# EAGLE board aircom (EAGLE 6.2)
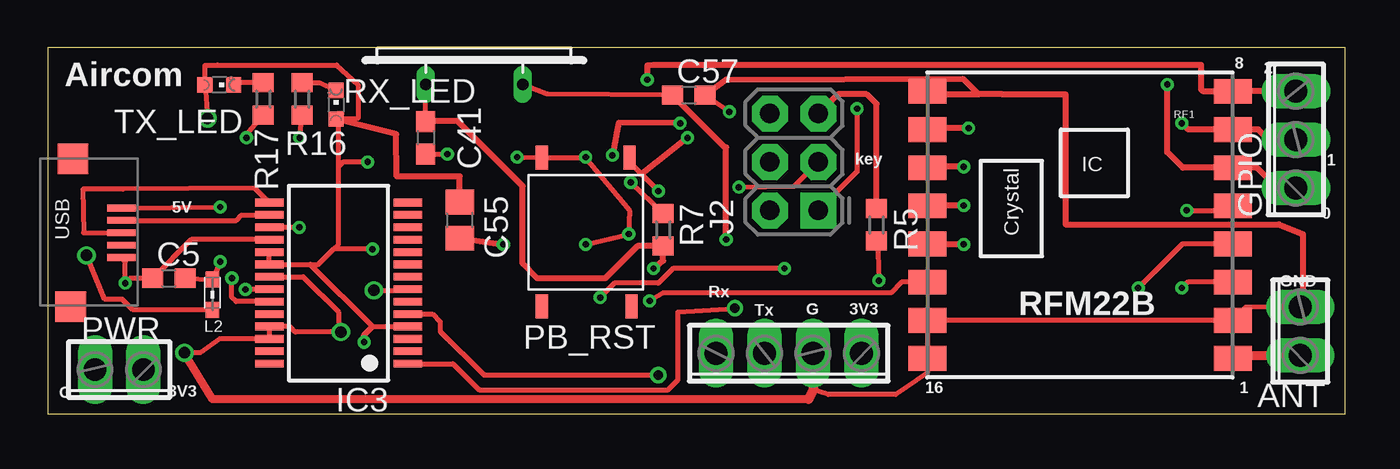
[diagram p0: board, top side]
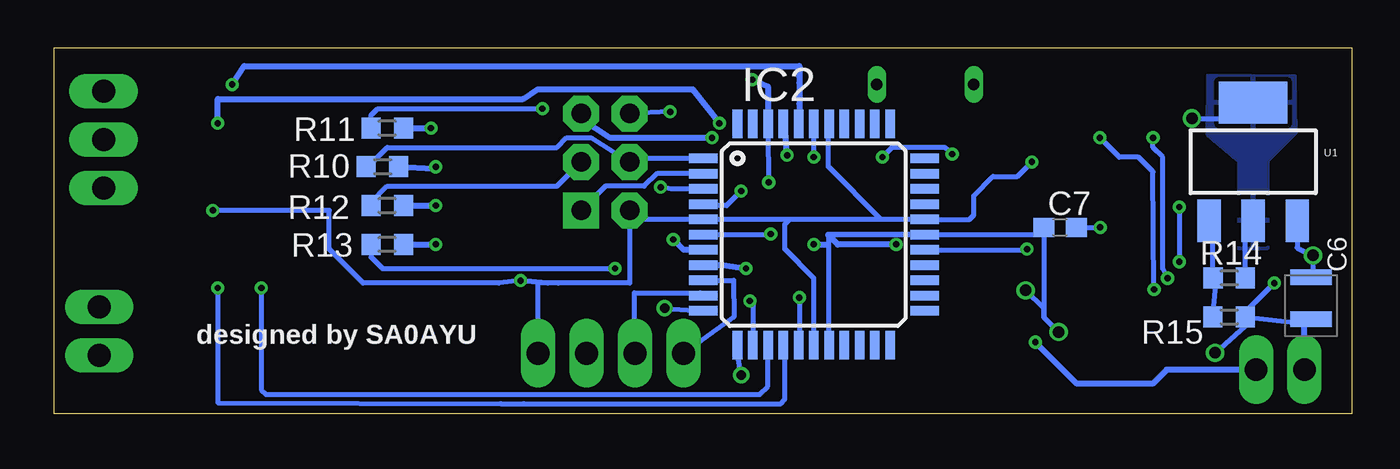
[diagram p1: board, bottom side, seen from below]

Size 68 x 19.2 mm. Coordinates in mm from the lower left corner, seen from the top.
Outline: 0,0 68,0 68,19.2 0,19.2 0,0
Copper layers (1*16): Top 0.0356mm / dielectric 1.5011mm / Bottom 0.0356mm
Design rules: minimum track width 6mil, minimum drill 13mil, track to track 6mil, track to pad 6mil, pad to pad 6mil, via to via 6mil, smd to smd 6mil, copper to edge 15mil, drill to drill 6mil, minimum pad ring 7mil, minimum via ring 7mil, stop-mask expansion 4mil, vias tented up to drill 0mil, thermal gap 10mil

## Footprints (pad centres in the part's own frame; a part is rotated, then mirrored left to right if it is on the bottom)
2POL254 = drill 1.2 long: 1 -1.27,0; 2 1.27,0
C0603 = smd 1.1 x 1: 1 -0.85,0; 2 0.85,0
SMC_CAP_B = smd 0.8 x 2.2: + -1.37,0.3; - 0.83,0.3
C0805 = smd 1.3 x 1.5: 1 -0.95,0; 2 0.95,0
3POL254 = drill 1.2 long: 1 -2.54,0; 2 0,0; 3 2.54,0
TQFP44 = smd 1.5 x 0.5: 1 -5.8,4; 2 -5.8,3.2; 3 -5.8,2.4; 4 -5.8,1.6; 5 -5.8,0.8; 6 -5.8,0; 7 -5.8,-0.8; 8 -5.8,-1.6; 9 -5.8,-2.4; 10 -5.8,-3.2; 11 -5.8,-4; 23 5.8,-4; 24 5.8,-3.2; 25 5.8,-2.4; 26 5.8,-1.6; 27 5.8,-0.8; 28 5.8,0; 29 5.8,0.8; 30 5.8,1.6; 31 5.8,2.4; 32 5.8,3.2; 33 5.8,4 | smd 0.5 x 1.5: 12 -4,-5.8; 13 -3.2,-5.8; 14 -2.4,-5.8; 15 -1.6,-5.8; 16 -0.8,-5.8; 17 0,-5.8; 18 0.8,-5.8; 19 1.6,-5.8; 20 2.4,-5.8; 21 3.2,-5.8; 22 4,-5.8; 34 4,5.8; 35 3.2,5.8; 36 2.4,5.8; 37 1.6,5.8; 38 0.8,5.8; 39 0,5.8; 40 -0.8,5.8; 41 -1.6,5.8; 42 -2.4,5.8; 43 -3.2,5.8; 44 -4,5.8
SSOP28 = smd 0.4 x 1.5: 1 -4.225,-3.625; 2 -3.575,-3.625; 3 -2.925,-3.625; 4 -2.275,-3.625; 5 -1.625,-3.625; 6 -0.975,-3.625; 7 -0.325,-3.625; 8 0.325,-3.625; 9 0.975,-3.625; 10 1.625,-3.625; 11 2.275,-3.625; 12 2.925,-3.625; 13 3.575,-3.625; 14 4.225,-3.625; 15 4.225,3.625; 16 3.575,3.625; 17 2.925,3.625; 18 2.275,3.625; 19 1.625,3.625; 20 0.975,3.625; 21 0.325,3.625; 22 -0.325,3.625; 23 -0.975,3.625; 24 -1.625,3.625; 25 -2.275,3.625; 26 -2.925,3.625; 27 -3.575,3.625; 28 -4.225,3.625
2X3-NS = drill 1.016 pad 1.88 square: 1 -2.54,-1.27 | drill 1.016 pad 1.88 octagon: 2 -2.54,1.27; 3 0,-1.27; 4 0,1.27; 5 2.54,-1.27; 6 2.54,1.27
0603 = smd 0.85 x 0.7: 1 -0.9,0; 2 0.7,0
PUSHBUTTON = smd 0.635 x 1.27: IN -2.3,4.29; IN2 -2.3,-3.51; OUT 2.3,4.29; OUT2 2.4,-3.51
Q = drill 0.61 long: 1 -2.54,-1.27; 2 2.54,-1.27
R0603 = smd 1 x 1.1: 1 -0.85,0; 2 0.85,0
RFM22-XXX-S2 = smd 2 x 1.3: 1 -8,7; 2 -8,5; 3 -8,3; 4 -8,1; 5 -8,-1; 6 -8,-3; 7 -8,-5; 8 -8,-7; 9 8,-7; 10 8,-5; 11 8,-3; 12 8,-1; 13 8,1; 14 8,3; 15 8,5; 16 8,7
4POL254 = drill 1.2 long: 1 -3.81,0; 2 -1.27,0; 3 1.27,0; 4 3.81,0
CHIPLED_0603 = smd 0.8 x 0.8: A 0,-0.75; C 0,0.75
SOT223 = smd 1.219 x 2.235: 1 -2.311,-3.099; 2 0,-3.099; 3 2.311,-3.099 | smd 3.6 x 2.2: 4 0,3.099
USB_MICRO_B = smd 0.35 x 1.5: 1 -0.38,-1.58; 2 -1.03,-1.58; 3 -1.68,-1.58; 4 -2.33,-1.58; 5 -2.98,-1.58 | smd 1.6 x 1.6: 6 -5.55,1.08; 7 2.2,0.97

## Placement (x,y rotation side)
ANT  [2POL254]  65.64,4.34 90 top
C5  10n  [C0603]  6.35,7.11 0 top
C6  4.7uF  [SMC_CAP_B]  2.44,5.8 270 bottom
C7  10n  [C0603]  15.29,9.78 0 bottom
C41  33p  [C0603]  19.81,14.48 270 top
C55  1µ  [C0805]  21.59,10.16 270 top
C57  33p  [C0603]  33.6,16.71 0 top
GPIO  [3POL254]  65.42,14.39 90 top
IC2  ATMEGA644-PUTQFP44  [TQFP44]  28.19,9.4 0 bottom
IC3  FT232RL  [SSOP28]  15.24,6.86 90 top
J2  AVR_SPI_PRG_6NS  [2X3-NS]  39.12,13.21 90 top
L2  300ohm  [0603]  8.64,6.35 90 top
PB_RST  PUSHBUTTON  [PUSHBUTTON]  28.19,9.14 0 top
PWR  [2POL254]  3.75,2.32 180 top
Q1  3.6864 MHz  [Q]  22.35,18.54 0 top
R5  2k4  [R0603]  43.43,9.91 270 top
R7  0  [R0603]  32.26,9.65 90 top
R10  0  [R0603]  50.8,12.95 180 bottom
R11  0  [R0603]  50.55,14.99 180 bottom
R12  0  [R0603]  50.55,10.92 180 bottom
R13  0  [R0603]  50.55,8.89 0 bottom
R14  390  [R0603]  6.42,7.13 0 bottom
R15  680  [R0603]  6.42,5.08 180 bottom
R16  270  [R0603]  13.34,16.51 90 top
R17  270  [R0603]  11.3,16.51 90 top
RF1  RFM22SMD  [RFM22-XXX-S2]  54.1,9.91 180 top
RS-232  [4POL254]  38.84,3.17 180 top
RX_LED  [CHIPLED_0603]  15.11,16.21 0 top
TX_LED  [CHIPLED_0603]  8.99,17.25 270 top
U1  V_REG_317SMD  [SOT223]  5.17,13.22 0 bottom
USB  USB_MICRO_B  [USB_MICRO_B]  2.29,11.18 90 top

## Library data of the parts
ANT GPIO PWR RS-232 = con-phoenix-254; OC_FARNELL: unknown; OC_NEWARK: unknown
C5 C7 C41 C55 C57 = rcl
C6 PB_RST USB = jockes_lib
IC2 = atmel
IC3 = ftdichip; MPN: FT232RL; OC_FARNELL: 1146032; OC_NEWARK: 91K9918
J2 RF1 U1 = SparkFun
L2 = wuerth-elektronik
Q1 = special
R5 R7 R10-R17 = resistor
RX_LED TX_LED = led

## Nets
3V3OUT: C7.2 IC3.17
+3V3: C55.1 IC2.5 IC2.17 IC2.27 IC2.29 IC2.38 IC3.4 IC3.19 IC3.20 J2.2 PWR.1 R5.2 R14.2 RF1.5 RS-232.1 RX_LED.A TX_LED.A U1.2 U1.4
+5V: C6.+ L2.1 U1.3
AGND: ANT.2 C5.1 C6.- C7.1 C41.2 C55.2 C57.2 IC2.6 IC2.18 IC2.28 IC2.39 IC3.7 IC3.18 IC3.21 IC3.25 IC3.26 J2.6 PB_RST.IN PWR.2 R15.1 RF1.2 RF1.9 RF1.15 RF1.16 RS-232.2 USB.5
AVR_RX: IC2.9 RS-232.4
AVR_RX1: IC2.11 IC3.1
AVR_TX: IC2.10 RS-232.3
AVR_TX1: IC2.12 IC3.5
CS_N: R13.2 RF1.13
D+: IC3.15 USB.3
D-: IC3.16 USB.2
GPIO0: GPIO.1 IC2.40 RF1.6
GPIO1: GPIO.2 IC2.41 RF1.7
GPIO2: GPIO.3 IC2.42 R7.2 RF1.8
IRQ_N: IC2.13 RF1.14
LED_RX: IC3.22 R16.1
LED_TX: IC3.23 R17.1
MISO: IC2.2 J2.1 R11.2
MOSI: IC2.1 J2.4 R10.2
N$1: ANT.1 RF1.1
N$6: R14.1 R15.2 U1.1
N$9: IC2.16 R13.1
N$16: R16.2 RX_LED.C
N$17: R17.2 TX_LED.C
RESET: IC2.4 J2.5 PB_RST.OUT R5.1
RXANT: IC2.15 RF1.3
SCK: IC2.3 J2.3 R12.2
SCLK: R12.1 RF1.12
SDI: R10.1 RF1.11
SDO: R11.1 RF1.10
TXANT: IC2.14 RF1.4
USB_VCC: C5.2 L2.2 USB.1
XTAL1: C41.1 IC2.8 Q1.1 R7.1
XTAL2: C57.1 IC2.7 Q1.2

## Tracks (layer width: path | path; a pad name or v marks a point on that pad's centre or on a via)
3V3OUT  (via drill 0.33)
  Top 0.254: v13.18,9.78 IC3.17
  Bottom 0.254: C7.2 v13.18,9.78
+3V3  (via drill 0.33, 0.6)
  Top 0.254: IC3.20 IC3.19 | IC3.20 13.76,7.83 17.02,4.57 18.85,4.57 IC3.4 | IC3.20 14.18,7.83 14.99,8.64 | 14.99,8.64 15.24,8.89 15.24,12.95 | 15.24,12.95 15.24,15.76 15.42,15.76 RX_LED.A 16.26,15.49 16.26,17.27 15.15,18.29 8.89,18.29 8.24,18.27 TX_LED.A 8.39,15.51 v8.38,15.49 | v16.76,13.21 15.49,13.21 15.24,12.95 | v17.02,8.64 14.99,8.64 | v59.69,10.67 61.86,10.67 RF1.5 | R5.2 43.52,8.47 v43.56,6.98
  Top 0.305: C55.1 21.59,12.45 18.29,12.45 18.27,14.67 RX_LED.A | v16.59,3.76 16.59,4.14 17.02,4.57
  Bottom 0.254: R14.2 5.57,9.73 U1.2 | v8.38,15.49 6,15.49 U1.4 | v16.76,13.21 17.53,12.45 18.8,12.45 19.81,11.43 19.81,10.41 20.03,10.2 IC2.29 24.68,10.2 | 24.68,10.2 27.43,12.95 27.43,15.16 IC2.38 | IC2.27 17.06,8.6 v17.02,8.64 | 24.68,10.2 29.46,10.2 | 29.46,10.2 29.72,10.2 IC2.5 37.38,10.2 J2.2 37.85,6.86 41.58,6.86 | IC2.17 28.19,7.11 29.72,8.64 29.72,9.94 29.46,10.2 | 41.58,6.86 42.67,6.86 RS-232.1 | 41.58,6.86 42.14,6.86 | 42.14,6.86 v43.56,6.98 | v43.56,6.98 44.7,6.86 51.82,6.86 53.59,8.64 53.59,10.67 v59.69,10.67 | v43.56,6.98 42.14,6.86
  Bottom 0.305: PWR.1 9.7,2.32 10.44,1.57 14.4,1.57 v16.59,3.76
  pour Bottom: 5.93,8.65 5.93,13.22 7.56,14.62 7.53,17.8 2.99,17.75 2.94,14.7 4.41,13.22 4.41,8.65
+5V  (via drill 0.6)
  Top 0.254: L2.1 4.46,5.45 3.91,6 3,6 v2.03,8.31
  Bottom 0.254: C6.+ 2.06,7.3 v2.03,8.31 2.86,8.7 U1.3
AGND  (via drill 0.33, 0.6)
  Top 0.254: USB.5 4.06,8 v4.06,6.86 4.32,7.11 C5.1 7.52,9.13 IC3.18 | v7.16,3.2 8,3.2 9.01,3.93 IC3.26 IC3.25 12.7,4.57 12.98,4.29 v15.37,4.29 15.24,4.42 15.24,5.33 13.39,7.18 IC3.21 | v17.09,6.48 18.81,6.48 IC3.7 | C57.2 v35.72,15.84 | C41.2 v20.94,13.63 | v24.6,13.46 PB_RST.IN 28.17,13.43 | ANT.2 62.78,5.59 RF1.2 RF1.15 RF1.16 46.1,2.16 44.45,1.02 40.89,1.02 40.13,1.27 RS-232.2 | 28.17,13.43 v28.19,13.46 | 28.17,13.43 30.48,10.67 v30.45,9.43 30.42,9.4 v28.19,8.89
  Top 0.305: C55.2 v23.88,8.89 | ANT.2 65.79,5.7 65.79,9.43 64.53,9.94 53.34,9.94 53.34,16.76 50.03,16.75 48.78,16.75 48.77,16.76 | C57.2 35.56,17.53 47.96,17.58 48.77,16.76 | RF1.9 46.24,16.76 48.77,16.76
  Top 0.406: 39.88,0.76 8.64,0.76 v7.16,3.2
  Top 0.508: RS-232.2 40.13,1.27 39.88,0.76
  Bottom 0.254: R15.1 2.78,4.77 C6.- | R15.1 5.42,5.5 v4.06,6.86 | v7.16,3.2 5.59,4.61 R15.1 | 16.14,5.07 C7.1 16.52,9.4 IC2.28 | 16.14,5.07 v15.37,4.29 | 16.14,5.07 16.14,5.52 v17.09,6.48 | v35.72,15.84 J2.6 | v20.94,13.63 21.34,13.97 23.37,13.97 24.09,13.97 v24.6,13.46 | 27.43,9.4 IC2.28 | IC2.28 27.43,9.4 | 27.43,9.4 27.43,8.89 27.43,3.64 IC2.18 | v28.19,13.46 IC2.39 | IC2.6 30.48,9.4 v30.45,9.43
  Bottom 0.305: v23.88,8.89 26.93,8.88 27.43,9.38 27.43,9.4 | v28.19,8.89 27.43,8.89 | PWR.2 2.48,4.63 C6.-
AVR_RX
  Bottom 0.254: IC2.9 32.4,7 32.39,5.08 RS-232.4
AVR_RX1  (via drill 0.5)
  Top 0.254: IC3.1 21.24,2.63 22.61,1.27 32.51,1.27 33.02,1.78 33.02,4.06 33.02,5.33 v36.02,5.54
  Bottom 0.254: v36.02,5.54 IC2.11
AVR_TX
  Bottom 0.254: RS-232.3 37.59,6.35 34.15,6.35 IC2.10
AVR_TX1  (via drill 0.5)
  Top 0.254: IC3.5 20.17,5.23 20.57,4.83 20.57,4.32 22.86,2.03 v32,2.03
  Bottom 0.254: v32,2.03 32.26,3.53 IC2.12
CS_N  (via drill 0.33)
  Top 0.305: v48.01,8.89 46.12,8.89 RF1.13
  Bottom 0.305: R13.2 v48.01,8.89
D+
  Top 0.254: IC3.15 10.85,11.84 3.94,11.79 1.84,11.79 1.88,9.5 USB.3
D-
  Top 0.254: USB.2 9.89,10.15 10.16,10.41 11.6,10.41 IC3.16
GPIO0  (via drill 0.33)
  Top 0.305: v58.67,17.27 58.67,13.72 59.48,12.91 RF1.6 63.37,12.9 64.43,11.85 GPIO.1
  Bottom 0.305: v58.67,17.27 58.04,18.24 28.96,18.24 28.96,17.68 28.96,17.35 28.96,16.92 28.96,16.26 28.96,15.24 IC2.40
GPIO1  (via drill 0.33)
  Top 0.305: v59.44,15.24 59.77,14.91 RF1.7 63.45,14.91 63.97,14.39 GPIO.2 | v33.15,15.24 29.92,15.26 v29.59,13.56
  Bottom 0.305: v59.44,15.24 59.44,16.51 43.43,16.51 42.67,17.02 34.54,17.02 v33.15,15.24 | v29.59,13.56 29.72,15.27 IC2.41
GPIO2  (via drill 0.33)
  Top 0.254: R7.2 30.57,12.1 v30.56,12.14
  Top 0.305: v31.42,17.53 31.42,18.26 31.73,18.29 60.2,18.29 60.45,18.29 60.45,17.02 60.56,16.91 RF1.8 62.13,16.93 GPIO.3
  Bottom 0.254: v30.56,12.14 30.56,13.21 30.58,13.74 30.58,15.19 IC2.42
  Bottom 0.305: v31.42,17.53 30.61,17.17 30.61,15.21 IC2.42
IRQ_N  (via drill 0.33)
  Top 0.254: RF1.14 44.75,6.91 44.2,6.35 32.26,6.35 v31.55,5.92
  Bottom 0.254: v31.55,5.92 31.39,5.77 31.39,4.67 31.39,3.83 IC2.13
LED_RX  (via drill 0.33)
  Top 0.254: IC3.22 10.49,6.53 v10.36,6.53 | v13.21,14.48 R16.1
  Bottom 0.254: v10.36,6.53 10.41,12.7 11.18,13.46 12.19,13.46 v13.21,14.48
LED_TX  (via drill 0.33)
  Top 0.254: IC3.23 9.87,5.88 9.65,6.1 v9.65,7.11 | v10.41,14.48 10.41,14.64 R17.1
  Bottom 0.254: v9.65,7.11 9.91,7.62 9.91,13.46 10.41,13.97 v10.41,14.48
MISO  (via drill 0.33)
  Top 0.254: v42.42,16 42.42,12.7 J2.1
  Bottom 0.254: IC2.2 36.42,12.6 37.08,11.94 39.12,11.94 J2.1 | R11.2 51.4,15.66 51.05,16 v42.42,16
MOSI
  Bottom 0.254: IC2.1 37.66,13.4 J2.4 39.88,14.48 41.15,14.48 41.66,13.97 50.55,13.97 51.56,12.95 R10.2
N$1
  Top 0.508: ANT.1 62.24,3.05 RF1.1
N$6
  Bottom 0.254: R15.2 7.12,6.73 R14.1 7.27,9.91 U1.1
N$9  (via drill 0.33)
  Top 0.254: v38.61,7.62 32.77,7.62 32,6.86 29.72,6.86 v28.96,6.1
  Bottom 0.254: R13.1 51.4,8.22 50.8,7.62 v38.61,7.62 | v28.96,6.1 28.96,3.64 IC2.16
N$16
  Top 0.254: R16.2 14.25,17.36 RX_LED.C
N$17
  Top 0.254: R17.2 9.98,17.36 TX_LED.C
RESET  (via drill 0.33)
  Top 0.254: PB_RST.OUT 30.49,13.19 31.12,12.57 v32,11.68
  Top 0.305: v33.53,14.48 31.12,12.57 | R5.1 43.43,16.26 42.93,16.76 41.4,16.76 J2.5
  Bottom 0.254: v32,11.68 32.77,10.92 33.92,10.92 IC2.4
  Bottom 0.305: J2.5 40.39,15.49 38.86,14.48 v33.53,14.48
RXANT  (via drill 0.33)
  Top 0.254: RF1.3 59.74,6.91 v59.44,6.6
  Bottom 0.254: v59.44,6.6 59.44,1.52 59.44,0.58 44.6,0.53 43.38,0.53 29.92,0.53 29.72,0.76 29.72,3.52 IC2.15
SCK  (via drill 0.33)
  Top 0.254: v36.22,11.89 39.12,11.94 J2.3
  Bottom 0.254: IC2.3 35.67,11.8 v36.22,11.89 | R12.2 51.4,11.09 50.55,11.94 41.66,11.94 J2.3
SCLK  (via drill 0.33)
  Top 0.305: v48.01,10.92 46.12,10.92 RF1.12
  Bottom 0.305: R12.1 v48.01,10.92
SDI  (via drill 0.33)
  Top 0.305: v48.01,12.95 46.15,12.95 RF1.11
  Bottom 0.305: R10.1 48.09,12.87 v48.01,12.95
SDO  (via drill 0.33)
  Top 0.305: v48.26,14.99 46.18,14.99 RF1.10
  Bottom 0.305: R11.1 v48.26,14.99
TXANT  (via drill 0.33)
  Top 0.254: RF1.4 59.45,8.91 v57.15,6.6
  Bottom 0.254: v57.15,6.6 57.15,1.27 56.9,1.02 31.04,1.02 30.61,1.45 30.61,3.58 IC2.14
USB_VCC  (via drill 0.33)
  Top 0.254: USB.1 v9.04,10.85 | v9.04,7.98 L2.2 C5.2
  Bottom 0.254: v9.04,10.85 v9.04,7.98
XTAL1  (via drill 0.33)
  Top 0.254: C41.1 Q1.1
  Top 0.305: v31.75,7.62 32.26,8.04 R7.1 30.9,8.8 29.21,7.11 25.65,7.11 24.89,7.87 24.89,11.94 24.38,12.45 21.49,15.34 19.83,15.34 C41.1
  Bottom 0.305: IC2.8 32.94,7.8 v31.75,7.62
XTAL2  (via drill 0.33)
  Top 0.254: C57.1 26.17,16.78 Q1.2
  Top 0.305: v35.56,9.14 35.56,13.97 35.5,13.97 C57.1
  Bottom 0.305: IC2.7 35.01,8.6 v35.56,9.14

## Text on the board
tNames: 8 | Aircom | 2 | key | 1 | 5V | 0 | Rx | GND | Tx | G | 3V3 | RFM22B | 3V3 | 16 | 1 | G
bNames: designed by SA0AYU
_tplace: T1 | C25 | R1 | L2 | ANT | C21 | C1 | L1 | L3 | C5 | C3 | TR1001 | D1 | C24 | R12 | J1 | IC | R11 | Crystal | R6 | R7 | Aircom | designed by SA0AYU | C6 | R14 | J3
_bplace: C23 | C22 | C2 | C10 | R2 | C4 | R13 | U1 | R10 | R4 | R3 | R15